# Altium PCB RFTP1812.PcbDoc
Units mm, origin at the board's own origin, x right, y up, seen from the top; angles counter-clockwise.
Board outline 60 x 25 mm, 2 copper layers (Top Layer, Bottom Layer); 3 components, 5 nets, 12 pads, 0 vias.
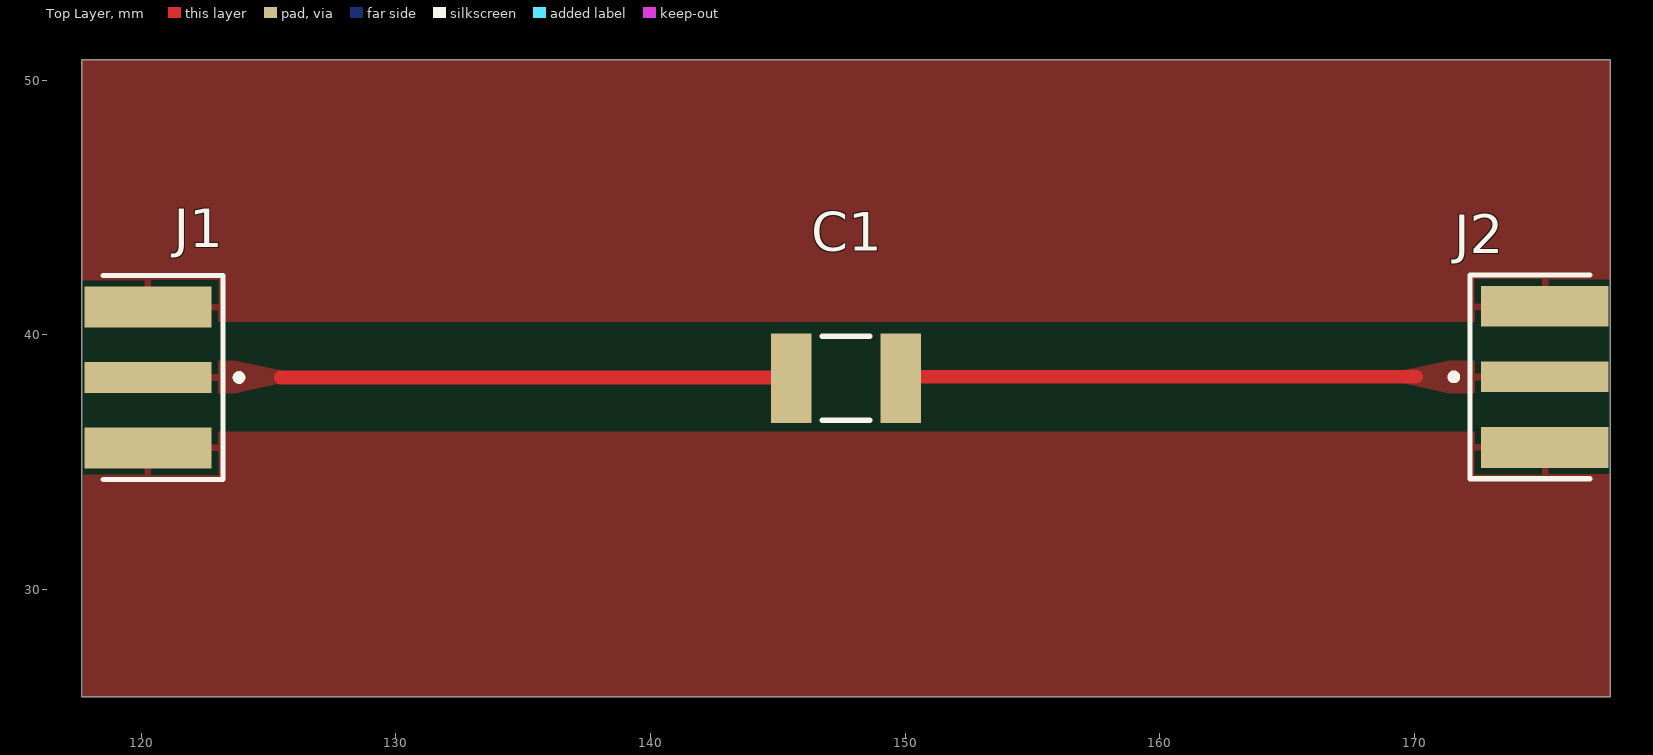
[diagram p0: Top Layer view]
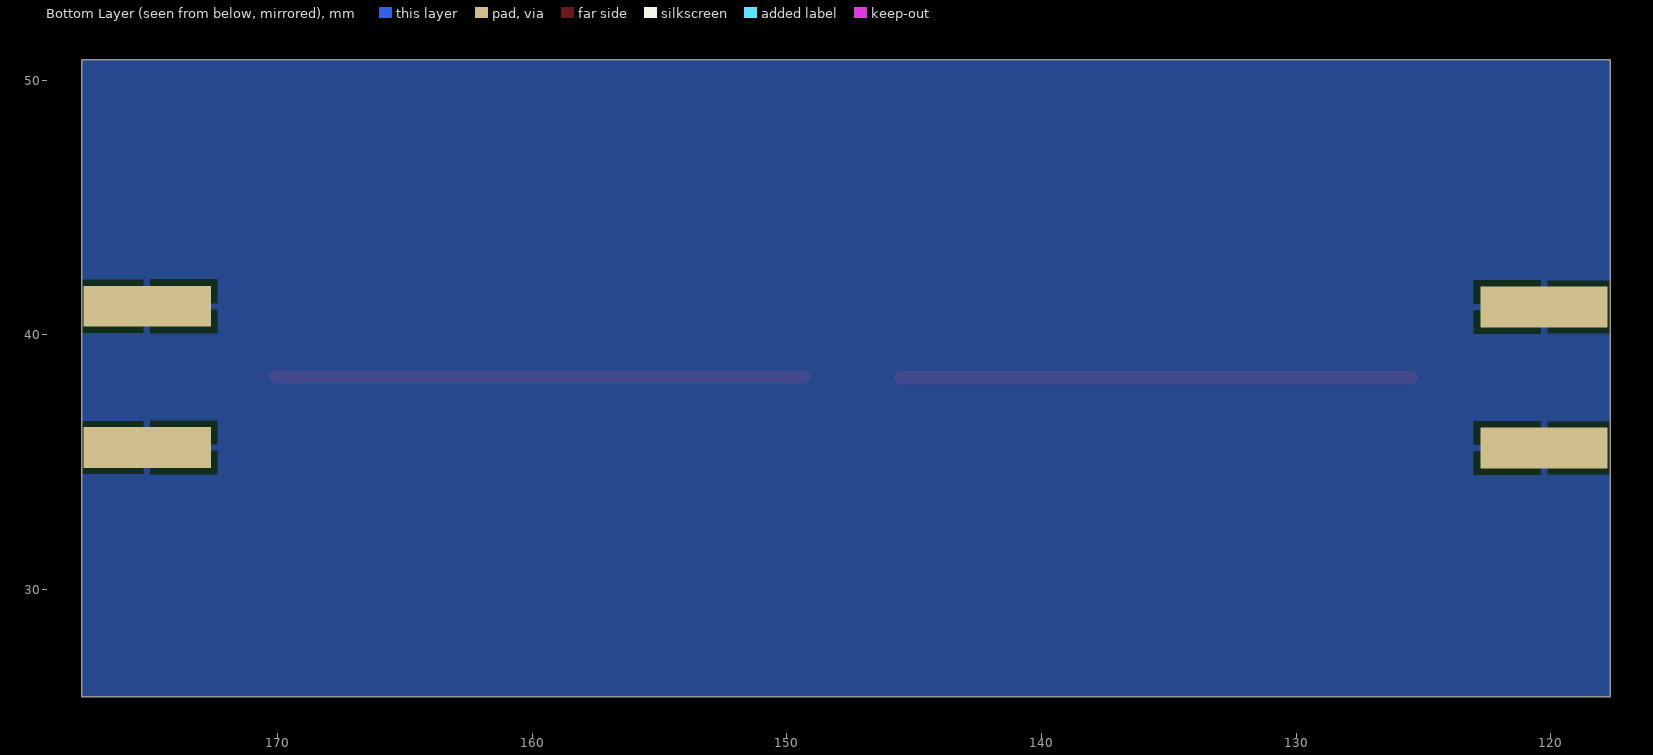
[diagram p1: Bottom Layer view, seen from below]

## Layer stack, top to bottom
Top Solder: solder mask 0.0102, Solder Resist, Dk 3.5
Top Layer: signal copper 0.0356
Dielectric 1: dielectric 0.32, FR-4, Dk 4.8
Bottom Layer: signal copper 0.0356
Bottom Solder: solder mask 0.0102, Solder Resist, Dk 3.5

## Board outline
117.673,25.8 117.673,50.8 177.673,50.8 177.673,25.8

## Design rules (kind name [scope] priority, off if disabled: settings)
Clearance [All] p1: gap=0.254 ignorepadtopadclearanceinfootprint=FALSE
PolygonConnect [All] p1: connectstyle=Relief reliefconductorwidth=0.254 reliefentries=4 polygonreliefangle="90 Angle" airgapwidth=0.254
RoutingVias [All] p1: holewidth=0.711 width=1.27 viastyle="Through Hole" minholewidth=0.711 minwidth=1.27 maxholewidth=0.711 maxwidth=1.27
SolderMaskExpansion [All] p1: expansion=0.102 istentingtop=FALSE
Width [All] p1: maxlimit=5 minlimit=0.254 preferedwidth=0.254 bottomlayer_maxwidth=0.254 minimp=50.000000 maximp=50.000000 favimp=50.000000
30 further rules are at their usual default settings.

## Components (designator, comment, footprint, x,y, rotation, side; value= is the part's Value field where it differs from the comment)
C1 "CAP 560pF 1KV 1812(4532)" CAPC1812(4532)230_M 147.673,38.3 r0 top value=560pF
J1 "CON-SMA-EDGE-S" FP-CON-SMA-EDGE-S-MFG 113.009,38.33 r90 top
J2 "CON-SMA-EDGE-S" FP-CON-SMA-EDGE-S-MFG 182.372,38.354 r270 top

## Footprints (in the part's own frame and the unit in brackets; to place one, negate y for a bottom-side part, rotate by r counter-clockwise, add the part's x,y. Pads: shape width x height; smd on the part's side, far side on the other; paste and mask are expansions set on the pad)
CAPC1812(4532)230_M [mm] "Chip Capacitor, Body 4.5x3.2mm, Height 2.3mm, IPC Low Density"
  rect 1.6x3.5 smd: 1(-2.15,0) 2(2.15,0)
  silkscreen extent -0.95,-1.65 0.95,1.65, body extent -2.4,-1.7 2.4,1.7, height 2.3
FP-CON-SMA-EDGE-S-MFG [mm]
  rect 1.2x5 smd paste+0 mask+0: 1(0,-7.26)
  rect 1.6x5 smd paste+0 mask+0: 2(-2.77,-7.26) 3(2.77,-7.26)
  rect 1.6x5 smd far side paste+0 mask+0: 4(-2.77,-7.26) 5(2.77,-7.26)
  silkscreen extent -4,-10.96 4,-5.5, body extent -3.67,-9.86 3.67,4.86, height 0.25

## Part data
C1: library part CMP-1040-00227-1, "CAP 560pF 1KV ±10% 1812 (4532 Metric) Thickness 2.3mm SMD", Case-EIA=1812, Case-Metric=4532, Rated Voltage="1K V", Tolerance=Â±10%, Max Thickness="2.3 mm", Technology=SMT
J1 J2: library part CMP-204357-000001-1, "CONN SMA JACK STR EDGE MNT", Frequency=18GHz, Manufacturer="RF Solutions Ltd.", Package=CONN_JACK, Automotive=No, Category=Conn, ComponentLink2Description=Datasheet, ComponentLink2URL=https://www.rfsolutions.co.uk/downloads/1498648656DS-CON-EDGE-SMA-4.pdf, Conn Orientation="Right Angle", Contact Material=Gold, Device Class L1=Connectors, Device Class L2="RF / Coaxial Connectors", Device Class L3=unset, Digikey Description="CONN SMA JACK STR EDGE MNT", Footprint Url=https://forum.upverter.com/uploads/default/original/3X/b/e/be75b907af57498775929d6d9099689c472e0307.pdf, Height=6.35mm, Impedance=50Ω, Is Female=yes, Lead Free=Yes, Manufacturer Part Number=CON-SMA-EDGE-S, Number of Contacts=1, Octopart=https://octopart.com/con-sma-edge-s-rf+solutions-70967450, RoHS=TRUE, Shielding=true

## Nets (pads, with @x,y where several pads share a name; then routed paths per layer and width w, separated by ;. In a path a pad name is that pad's centre, name@x,y a point inside that pad or via, vN(x,y) a via of type N, cw(c..) or ccw(c..) an arc to the next point about the centre after c; other vN are vias at no path point)
GND: J1.4 J1.5 J2.4 J2.5
GND1: J1.3 J2.2
GND2: J1.2 J2.3
NetC1_1: C1.1 J1.1 | length 20
  Top Layer w0.535: 125.476,38.33 C1.1@145.523,38.33
NetC1_2: C1.2 J2.1 | length 20.8
  Top Layer w0.254: C1.2@149.273,38.3 C1.2@149.327,38.354
  Top Layer w0.535: C1.2@149.327,38.354 170.053,38.354

## Polygon pours and split planes (outlines as drawn)
GND on Bottom Layer "NONET_L02_P-001" (solid, pour order 0): 117.692,50.8 177.673,50.8 177.673,25.8 117.692,25.8
NetC1_1 on Top Layer "NONET_L02_P-001" (solid, pour order 3): 118.364,37.719 118.364,38.989 123.698,38.989 125.476,38.608 125.476,38.1 123.698,37.719
NetC1_2 on Top Layer "NONET_L02_P-001" (solid, pour order 4): 176.657,38.989 176.657,37.719 171.323,37.719 169.545,38.1 169.545,38.608 171.323,38.989
GND2 on Top Layer "NONET_L02_P-001" (solid, pour order 1): 177.673,25.781 117.729,25.781 117.729,36.195 177.673,36.195
GND1 on Top Layer "NONET_L02_P-001" (solid, pour order 2): 117.673,50.8 177.673,50.8 177.673,40.513 117.673,40.513